# EAGLE board power splitter (EAGLE 6.3)
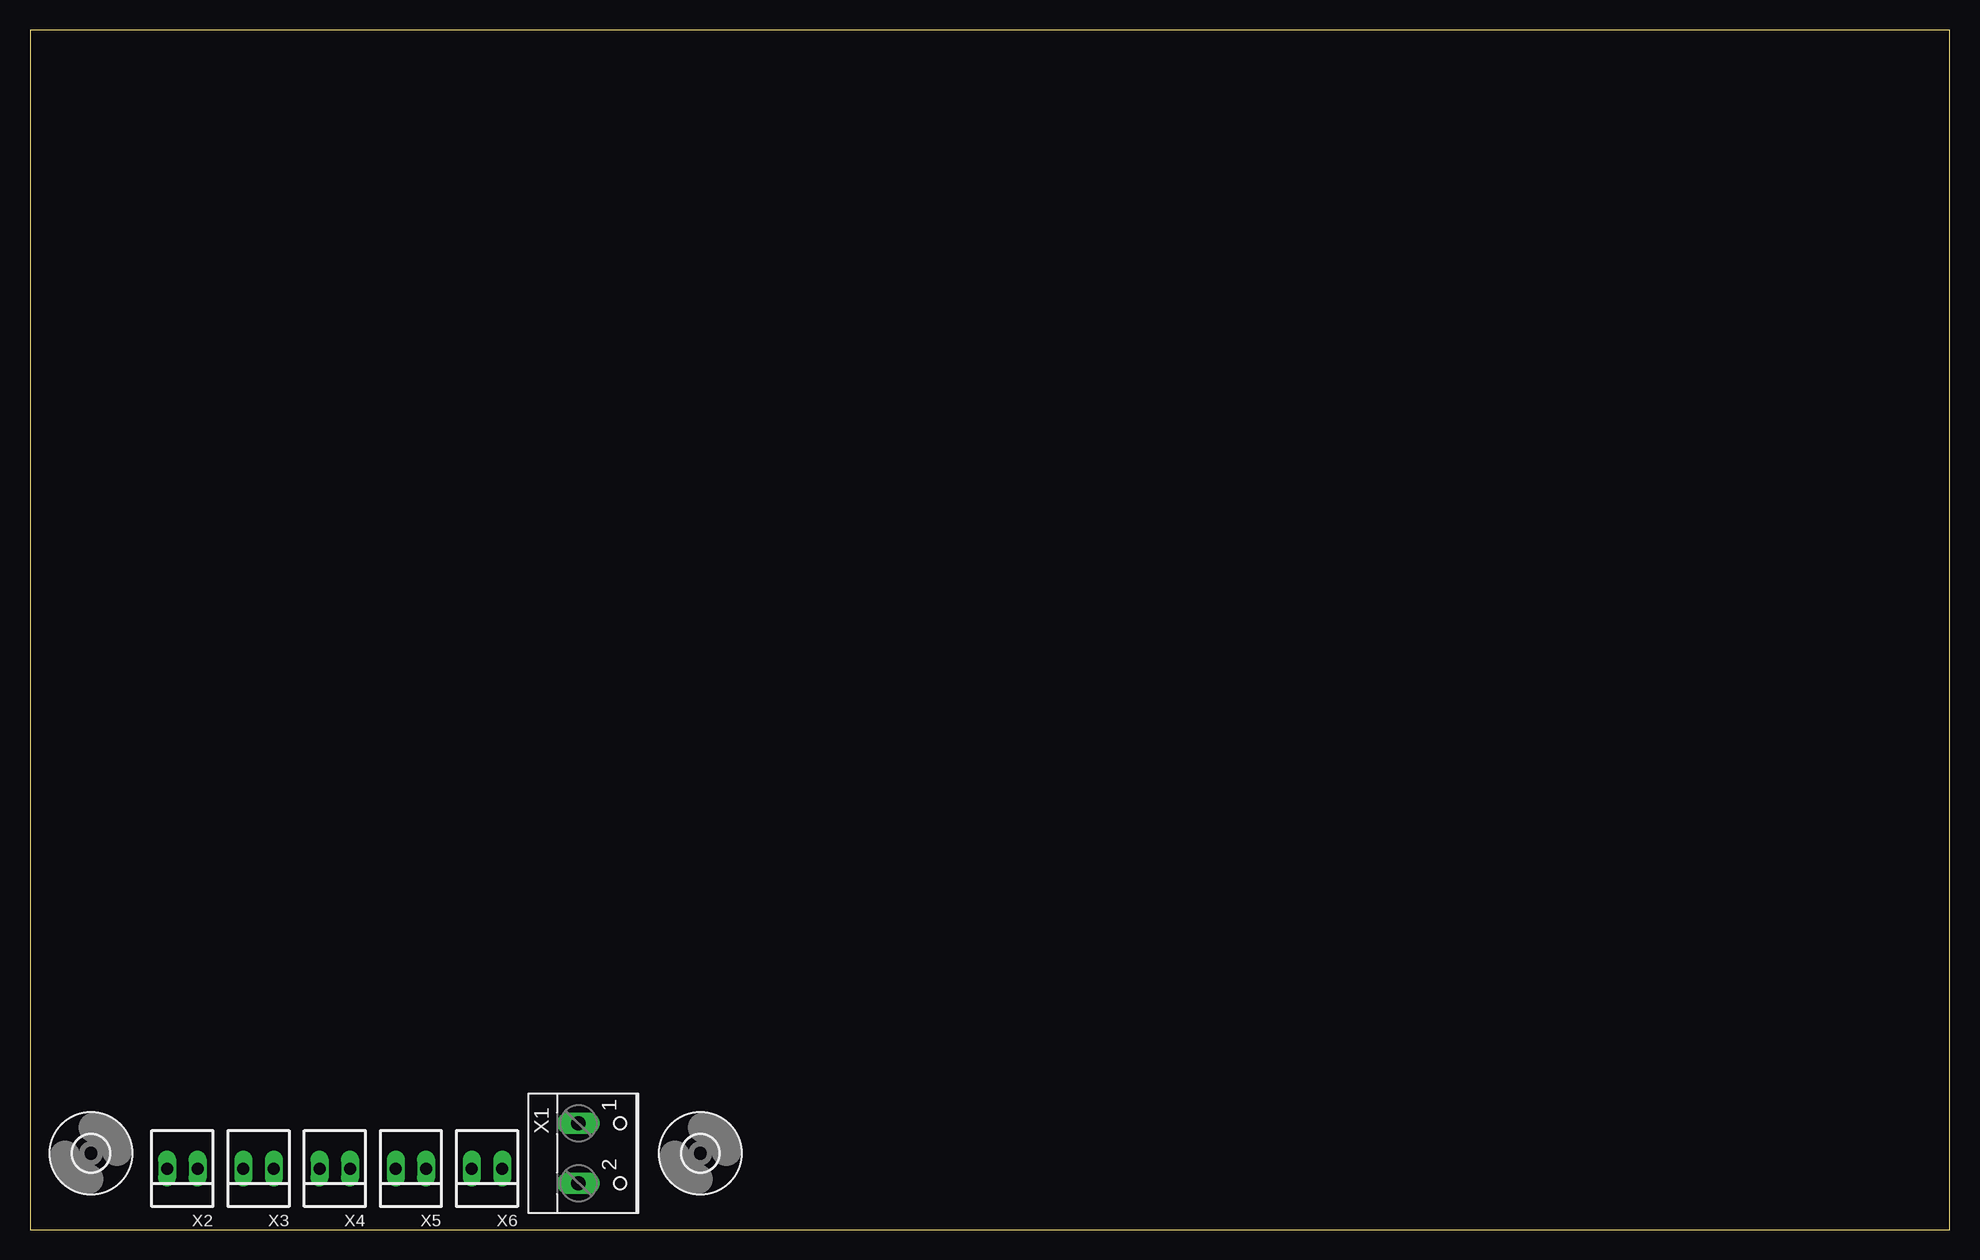
[diagram p0: board, top side]
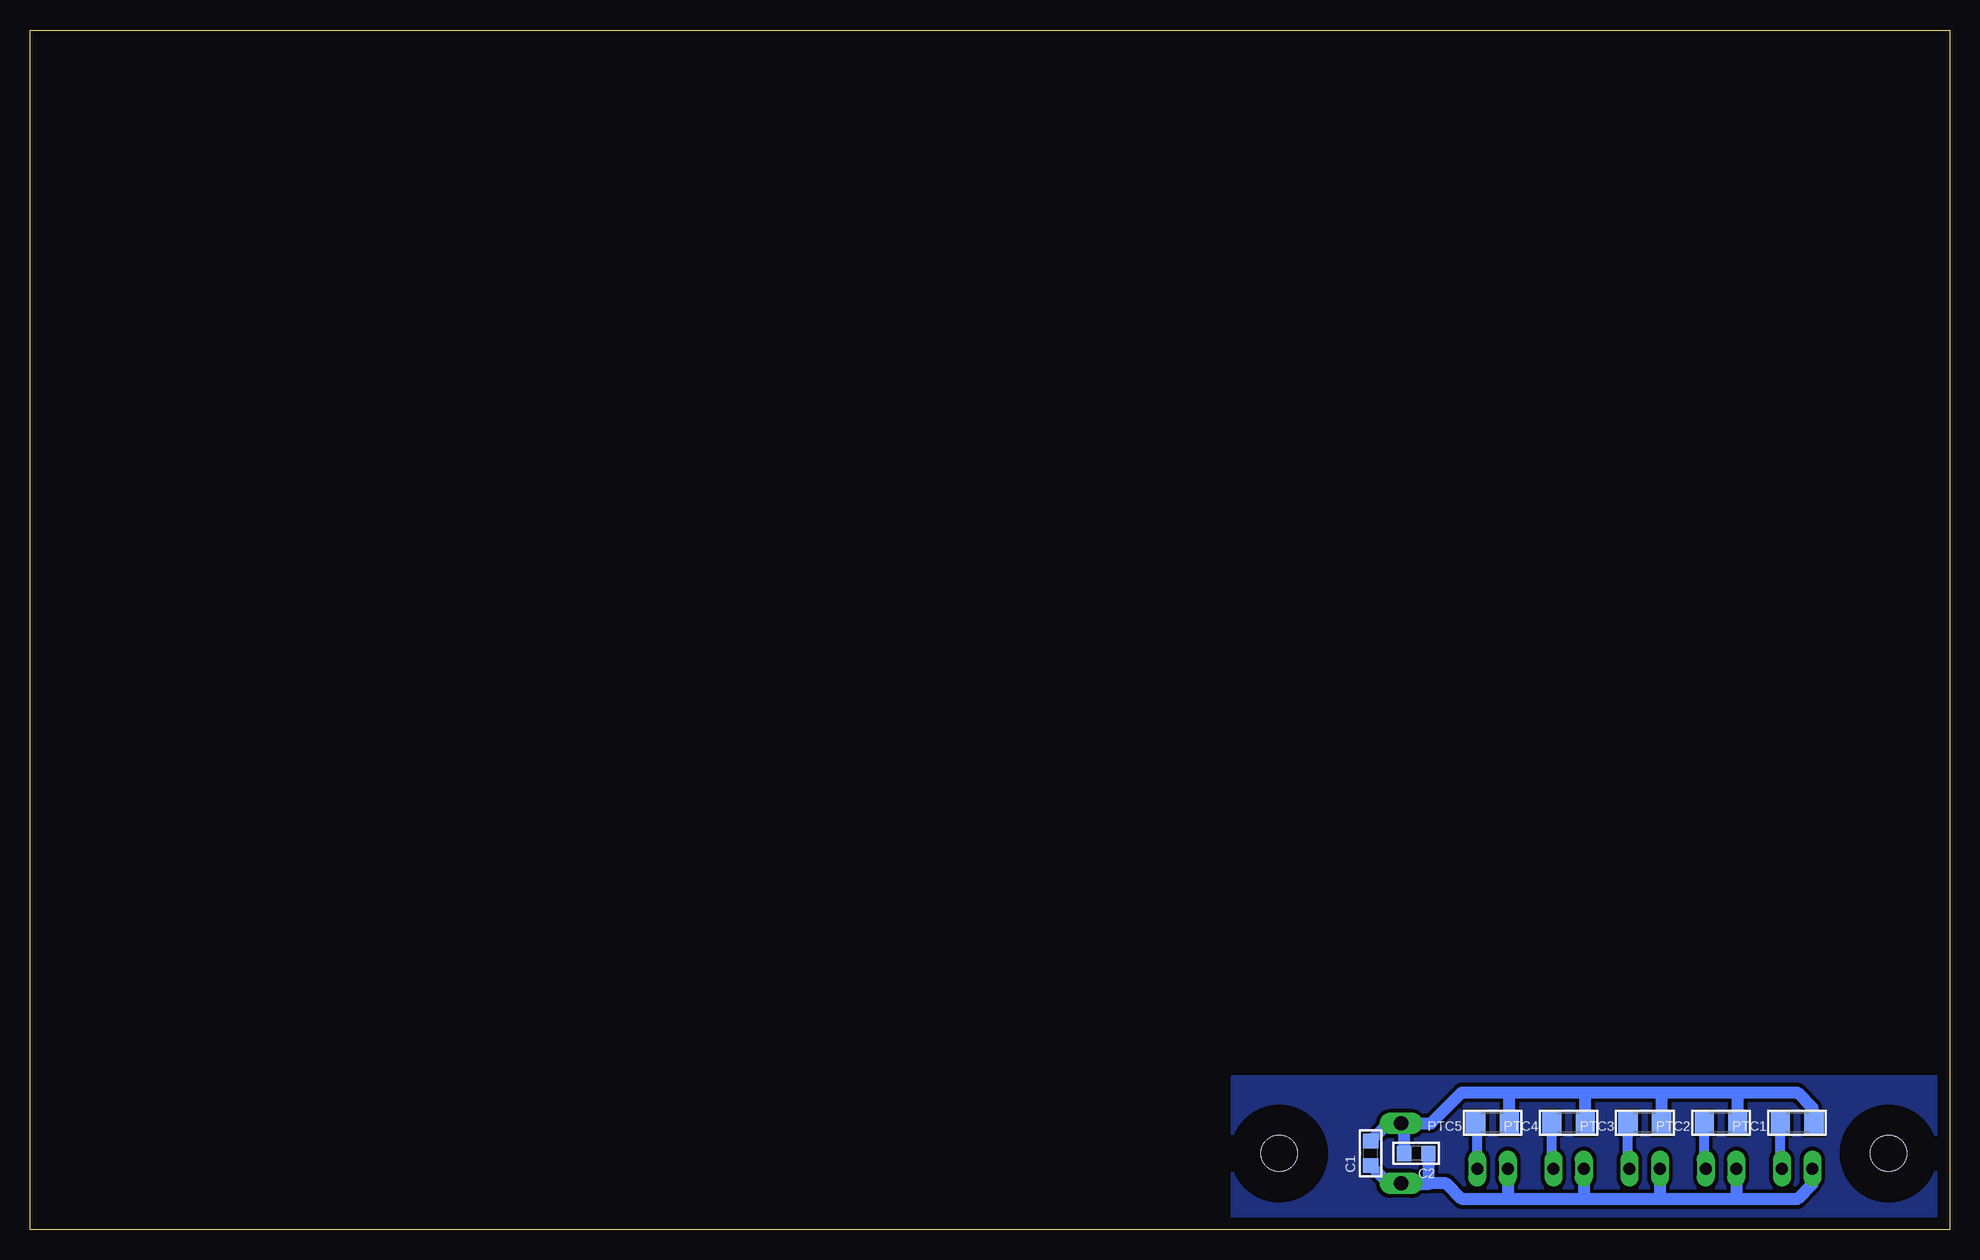
[diagram p1: board, bottom side, seen from below]

Size 160 x 100 mm. Coordinates in mm from the lower left corner, seen from the top.
Outline: 0,0 160,0 160,100 0,100 0,0
Copper layers (1*16): Top 0.035mm / dielectric 1.5mm / Bottom 0.035mm
Design rules "default *": minimum track width 10mil, minimum drill 24mil, track to track 12mil, track to pad 12mil, pad to pad 12mil, via to via 12mil, smd to smd 12mil, copper to edge 40mil, drill to drill 8mil, minimum pad ring 10mil, minimum via ring 8mil, stop-mask expansion 4mil, vias tented up to drill 0mil, thermal gap 10mil

## Footprints (pad centres in the part's own frame; a part is rotated, then mirrored left to right if it is on the bottom)
_0805 = smd 1.2 x 1.3: 1 -1.016,0; 2 1.016,0
3,0 = hole 3: 0,0
1206 = smd 1.6 x 1.8: 1 -1.4,0; 2 1.4,0
W237-102 = drill 1.194 long: 1 -2.5,-1.27; 2 2.5,-1.27
22-23-2021 = drill 1 long: 1 -1.27,0; 2 1.27,0

## Placement (x,y rotation side)
C1  [_0805]  48.26,6.35 90 bottom
C2  [_0805]  44.45,6.35 180 bottom
H1  MOUNT-HOLE3.0  [3,0]  55.88,6.35 0 top
H2  MOUNT-HOLE3.0  [3,0]  5.08,6.35 0 top
PTC1  [1206]  12.7,8.89 180 bottom
PTC2  [1206]  19.05,8.89 180 bottom
PTC3  [1206]  25.4,8.89 180 bottom
PTC4  [1206]  31.75,8.89 180 bottom
PTC5  [1206]  38.1,8.89 180 bottom
X1  [W237-102]  46.99,6.35 270 top
X2  22-23-2021  [22-23-2021]  12.7,5.08 180 top
X3  22-23-2021  [22-23-2021]  19.05,5.08 180 top
X4  22-23-2021  [22-23-2021]  25.4,5.08 180 top
X5  22-23-2021  [22-23-2021]  31.75,5.08 180 top
X6  22-23-2021  [22-23-2021]  38.1,5.08 180 top

## Library data of the parts
C1 C2 PTC1-PTC5 = microbuilder
H1 H2 = holes
X1 = con-wago-500; MPN: 237-102; OC_FARNELL: unknown; OC_NEWARK: 70K9898
X2-X6 = con-molex; MF: MOLEX; MPN: 22-23-2021; OC_FARNELL: 1462926; OC_NEWARK: 25C3832

## Nets
N$1: PTC1.2 X2.1
N$2: PTC2.2 X3.1
N$3: PTC3.2 X4.1
N$4: PTC4.2 X5.1
N$5: PTC5.2 X6.1
N$6: C1.2 C2.2 PTC1.1 PTC2.1 PTC3.1 PTC4.1 PTC5.1 X1.1
N$7: C1.1 C2.1 X1.2 X2.2 X3.2 X4.2 X5.2 X6.2

## Tracks (layer width: path | path; a pad name or v marks a point on that pad's centre or on a via)
N$1
  Bottom 0.813: X2.1 14.1,5.08 PTC1.2
N$2
  Bottom 0.813: X3.1 20.45,5.08 PTC2.2
N$3
  Bottom 0.813: X4.1 26.8,5.08 PTC3.2
N$4
  Bottom 0.813: X5.1 33.15,5.08 PTC4.2
N$5
  Bottom 0.813: X6.1 39.37,8.76 PTC5.2
N$6
  Bottom 1.016: X1.1 43.22,8.85 40.64,11.43 36.83,11.43 | 36.83,11.43 30.48,11.43 | 30.48,11.43 24.13,11.43 | 24.13,11.43 17.78,11.43 | 17.78,11.43 12.7,11.43 11.43,10.16 11.43,9.02 PTC1.1 | PTC2.1 17.65,11.3 17.78,11.43 | PTC3.1 24,11.3 24.13,11.43 | PTC4.1 30.35,11.3 30.48,11.43 | PTC5.1 36.7,11.3 36.83,11.43 | X1.1 45.47,8.6 C2.2 | X1.1 46.78,8.85 C1.2
N$7
  Bottom 1.016: X2.2 11.43,3.81 12.7,2.54 17.78,2.54 | 17.78,2.54 24.13,2.54 | 24.13,2.54 30.48,2.54 | 30.48,2.54 36.83,2.54 | 36.83,2.54 40.64,2.54 41.95,3.85 X1.2 | X6.2 36.83,2.54 | X5.2 30.48,2.54 | X4.2 24.13,2.54 | X3.2 17.78,2.54 | C1.1 46.78,3.85 X1.2 | C2.1 43.43,3.81 45.72,3.81 X1.2
N$8
  pour Bottom: 0,0 59.69,0 59.69,12.7 0,12.7
N$9  (via drill 0.6)
  other vias: 5.08,6.35
N$10  (via drill 0.6)
  other vias: 55.88,6.35